# EAGLE board lock-board2_v3 (EAGLE 7.6.0)
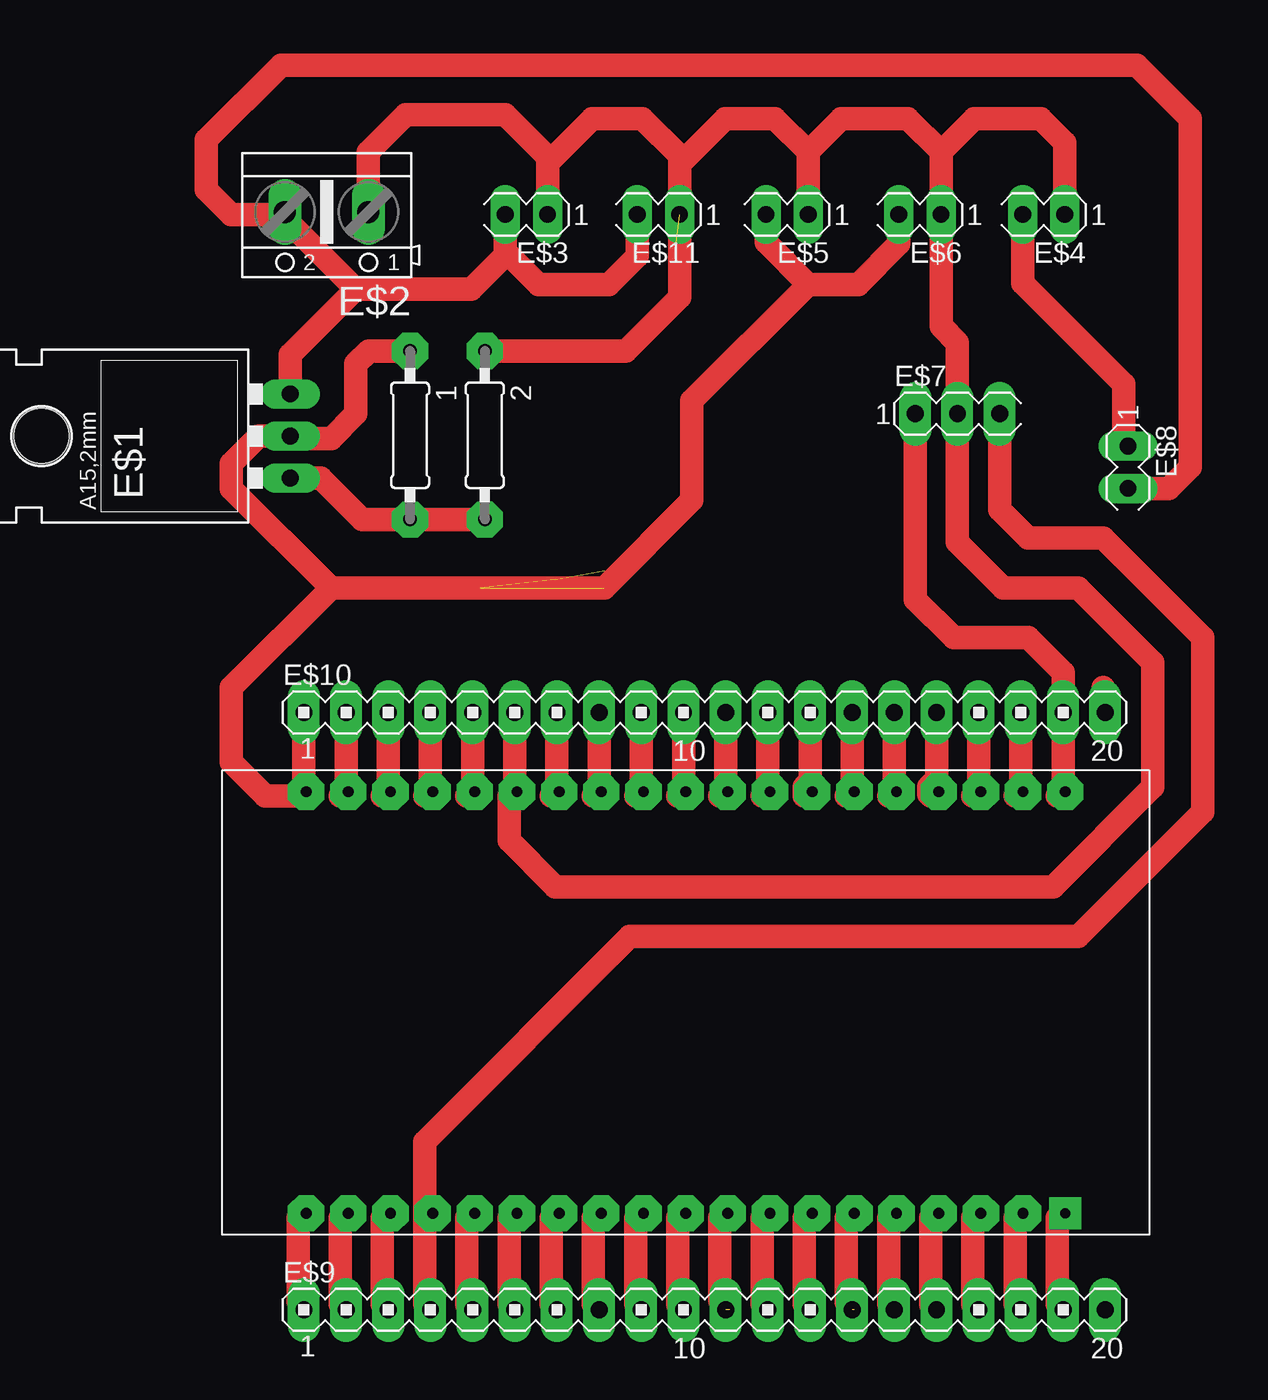
[diagram p0: board, top side]
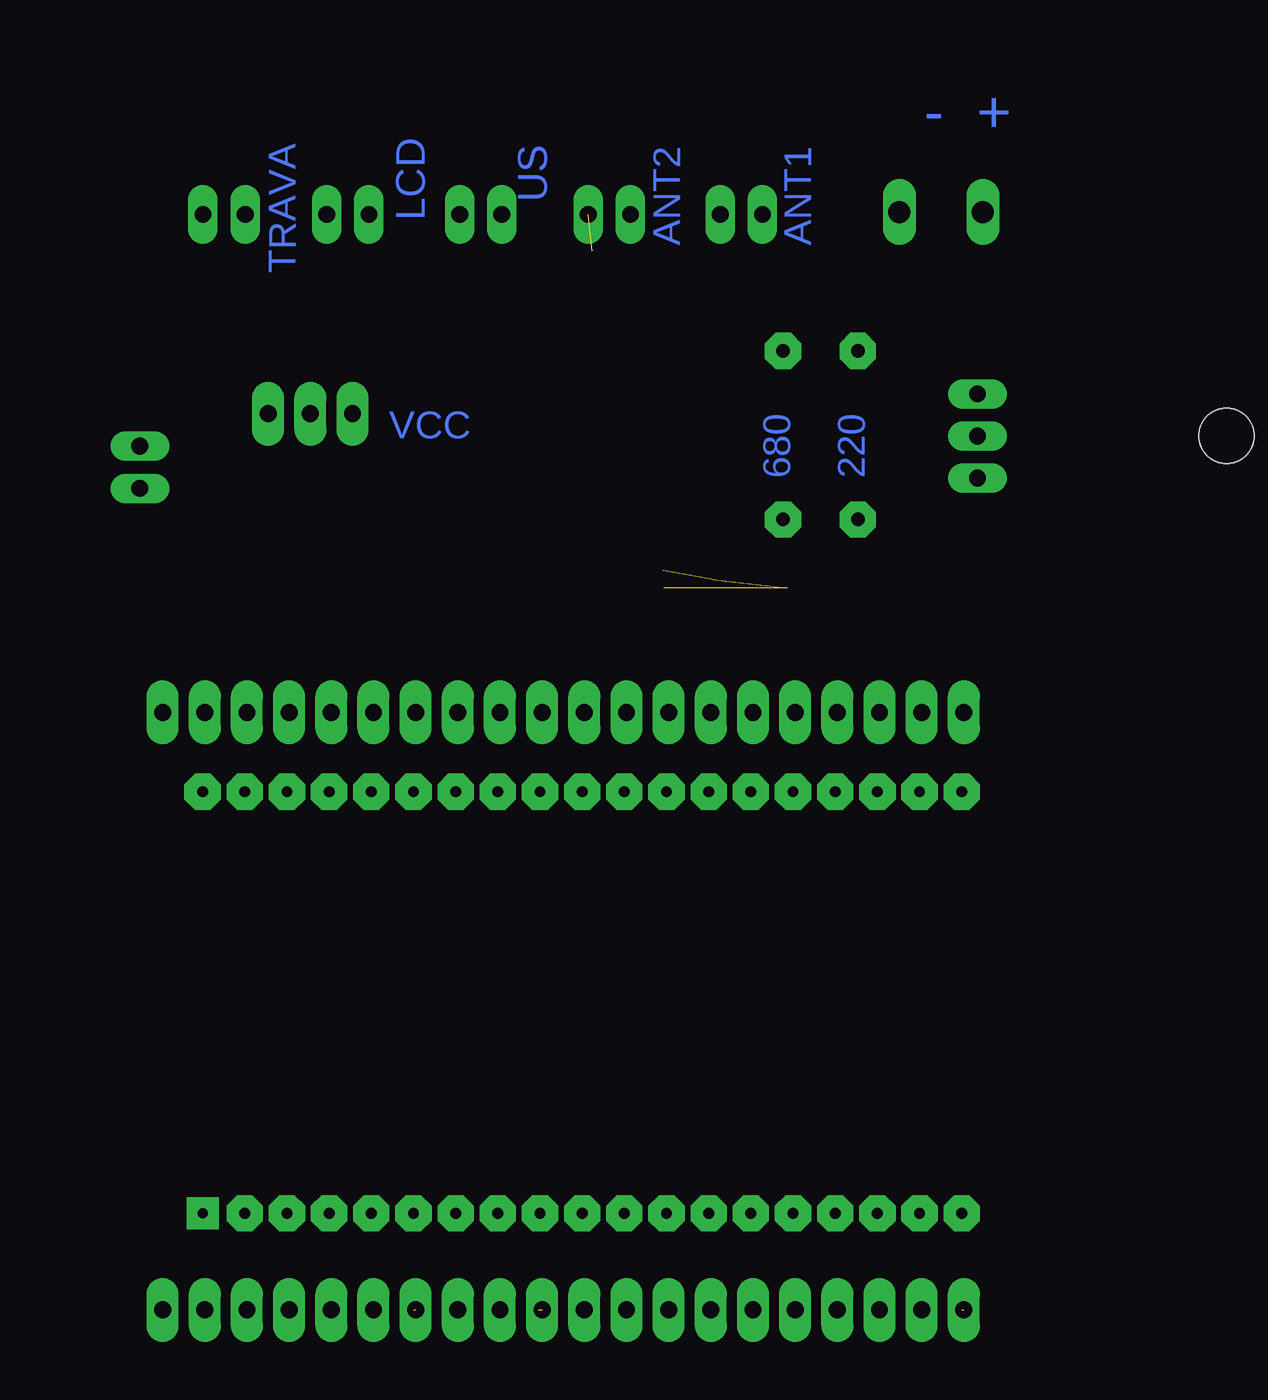
[diagram p1: board, bottom side, seen from below]

No outline drawn. Coordinates in mm, seen from the top.
Copper layers (1*16): Top 0.035mm / dielectric 1.5mm / Bottom 0.035mm
Design rules "default": minimum track width 10mil, minimum drill 24mil, track to track 8mil, track to pad 8mil, pad to pad 8mil, via to via 8mil, smd to smd 8mil, copper to edge 40mil, drill to drill 8mil, minimum pad ring 10mil, minimum via ring 8mil, stop-mask expansion 4mil, vias tented up to drill 0mil, thermal gap 10mil
Net classes: 0 default: clearance 0.205 mm

## Footprints (pad centres in the part's own frame; a part is rotated, then mirrored left to right if it is on the bottom)
0207/10 = drill 0.813 pad 2.184 octagon: 1 -5.08,0; 2 5.08,0
317TL = drill 1.016 pad 1.778 long: 1 -2.54,-3.81; 2 0,-3.81; 3 2.54,-3.81 | hole 3.302: 0,11.176
AK500/2 = drill 1.321 long: 1 -2.515,0; 2 2.515,0
MA03-1 = drill 1.016 pad 1.778 long: 1 -2.54,0; 2 0,0
MA04-1 = drill 1.016 pad 1.93 long: 1 -3.81,0; 2 -1.27,0; 3 1.27,0
MA20-1 = drill 1.016 pad 1.93 long: 1 -24.13,0; 2 -21.59,0; 3 -19.05,0; 4 -16.51,0; 5 -13.97,0; 6 -11.43,0; 7 -8.89,0; 8 -6.35,0; 9 -3.81,0; 10 -1.27,0; 11 1.27,0; 12 3.81,0; 13 6.35,0; 14 8.89,0; 15 11.43,0; 16 13.97,0; 17 16.51,0; 18 19.05,0; 19 21.59,0; 20 24.13,0
ESP32 = drill 0.6 pad 1.93 square: P$20 -60.96,-30.48 | drill 0.65 pad 2.184 octagon: P$21 -60.96,-27.94; P$41 -60.96,-25.4; P$42 -60.96,-22.86; P$43 -60.96,-20.32; P$44 -60.96,-17.78; P$45 -60.96,-15.24; P$46 -60.96,-12.7; P$47 -60.96,-10.16; P$48 -60.96,-7.62; P$49 -60.96,-5.08; P$50 -60.96,-2.54; P$51 -60.96,0; P$52 -60.96,2.54; P$53 -60.96,5.08; P$54 -60.96,7.62; P$55 -60.96,10.16; P$56 -60.96,12.7; P$57 -60.96,15.24; P$58 -35.56,15.24; P$59 -35.56,12.7; P$60 -35.56,10.16; P$61 -35.56,7.62; P$62 -35.56,5.08; P$63 -35.56,2.54; P$64 -35.56,0; P$65 -35.56,-2.54; P$66 -35.56,-5.08; P$67 -35.56,-7.62; P$68 -35.56,-10.16; P$69 -35.56,-12.7; P$70 -35.56,-15.24; P$71 -35.56,-17.78; P$72 -35.56,-20.32; P$73 -35.56,-22.86; P$74 -35.56,-25.4; P$75 -35.56,-27.94; P$76 -35.56,-30.48

## Placement (x,y rotation side)
1  [0207/10]  35.45,64.93 270 top
2  [0207/10]  39.95,64.93 270 top
E$1  [317TL]  24.43,64.88 90 top
E$2  [AK500/2]  30.43,78.38 180 top
E$3  [MA03-1]  41.19,78.23 180 top
E$4  [MA03-1]  72.35,78.23 180 top
E$5  [MA03-1]  56.89,78.23 180 top
E$6  [MA03-1]  64.89,78.23 180 top
E$7  [MA04-1]  69.69,66.23 0 top
E$8  [MA03-1]  78.69,61.73 270 top
E$9  [MA20-1]  53.19,12.23 0 top
E$10  [MA20-1]  53.19,48.23 0 top
E$11  [MA03-1]  49.14,78.23 180 top
E$23  [ESP32]  44.43,79.01 90 top

## Library data of the parts
1 2 = eagle-ltspice
E$1 = v-reg
E$2 = con-ptr500
E$3-E$11 = con-lstb
E$23 = esp32

## Nets
S$1: 1.2 2.2 E$1.1
S$2: E$1.3 E$2.2 E$3.2 E$8.2 E$11.2
S$5: E$4.2 E$8.1
S$6: E$9.1
S$8: E$9.2
S$10: E$9.3
S$26: E$7.3 E$9.4
S$32: E$9.5
S$45: E$9.6
S$88: E$9.7
S$89: E$9.8
S$90: E$9.9
S$91: E$9.10
S$92: E$9.11
S$93: E$9.12
S$94: E$9.13
S$95: E$9.14
S$96: E$9.15
S$97: E$9.16
S$98: E$9.17
S$99: E$9.18
S$100: E$9.19
S$101: 1.1 E$1.2 E$5.2 E$6.2 E$10.1
S$102: E$10.2
S$103: E$10.3
S$104: E$10.4
S$105: E$10.5
S$106: 2.1 E$2.1 E$3.1 E$4.1 E$5.1 E$6.1 E$7.2 E$10.6 E$11.1
S$107: E$10.7
S$108: E$10.8
S$109: E$10.9
S$110: E$10.10
S$111: E$10.11
S$112: E$10.12
S$113: E$10.13
S$114: E$10.14
S$115: E$10.15
S$116: E$10.16
S$117: E$10.17
S$118: E$10.18
S$119: E$7.1 E$10.19
S$120: E$10.20

## Tracks (layer width: path | path; a pad name or v marks a point on that pad's centre or on a via)
S$1
  Top 1.422: E$1.1 30.08,62.34 32.57,59.85 1.2 2.2
S$2
  Top 1.422: E$1.3 28.24,69.78 32.19,73.73 | 32.19,73.73 27.91,78 E$2.2 27.77,78.23 24.69,78.23 23.19,79.73 23.19,82.73 27.69,87.23 79.21,87.23 82.43,84.01 82.43,63.01 81.15,61.73 E$8.2 | E$3.2 41.19,76.01 | 41.19,76.01 41.19,75.77 39.15,73.73 32.19,73.73 | E$11.2 49.14,75.72 47.43,74.01 43.19,74.01 41.19,76.01
S$5
  Top 1.422: E$4.2 72.35,74.09 78.43,68.01 78.43,64.53 E$8.1
S$6  (1 unrouted)
  Top 1.422: 28.71,17.79 28.71,12.71 29.19,12.23
S$8
  Top 1.422: 31.25,17.79 31.25,12.58 E$9.2
S$10
  Top 1.422: 33.79,17.79 33.79,12.58 E$9.3
S$26
  Top 1.422: E$9.4 36.33,12.58 36.33,22.37 48.69,34.73 75.69,34.73 83.19,42.23 83.19,52.73 77.19,58.73 72.69,58.73 70.96,60.46 E$7.3
S$32
  Top 1.422: 38.87,17.79 38.87,12.58 E$9.5
S$45
  Top 1.422: 41.41,17.79 41.41,12.58 E$9.6
S$88
  Top 1.422: 43.95,17.79 43.95,12.58 E$9.7
S$89
  Top 1.422: 46.49,17.79 46.49,12.58 E$9.8
S$90
  Top 1.422: 49.03,17.79 49.03,12.58 E$9.9
S$91
  Top 1.422: 51.57,17.79 51.57,12.58 E$9.10
S$92  (1 unrouted)
  Top 1.422: 54.11,17.79 54.11,12.81 54.69,12.23
S$93
  Top 1.422: 56.65,17.79 56.65,12.58 E$9.12
S$94
  Top 1.422: 59.19,17.79 59.19,12.58 E$9.13
S$95  (1 unrouted)
  Top 1.422: 61.73,17.79 61.73,12.69 62.19,12.23
S$96
  Top 1.422: 64.27,17.79 64.27,12.58 E$9.15
S$97
  Top 1.422: 66.81,17.79 66.81,12.58 E$9.16
S$98
  Top 1.422: 69.35,17.79 69.35,12.58 E$9.17
S$99
  Top 1.422: 71.89,17.79 71.89,12.58 E$9.18
S$100
  Top 1.422: 74.43,17.79 74.43,12.58 E$9.19
S$101  (3 unrouted)
  Top 1.422: E$10.1 29.06,43.86 29.19,43.73 29.19,43.67 28.71,43.19 26.73,43.19 24.69,45.23 24.69,49.73 30.69,55.73 | 1.1 32.97,70.01 32.19,69.23 32.19,66.23 30.69,64.73 28.39,64.73 E$1.2 26.34,64.88 24.69,63.23 24.69,61.73 30.69,55.73 | 30.69,55.73 47.15,55.73 52.43,61.01 52.43,67.01 59.43,74.01 | E$6.2 64.89,76.47 62.43,74.01 59.43,74.01 | E$5.2 56.89,76.55 59.43,74.01
S$102
  Top 1.422: E$10.2 31.6,43.54 31.25,43.19
S$103
  Top 1.422: E$10.3 34.14,43.54 33.79,43.19
S$104
  Top 1.422: E$10.4 36.68,43.74 36.69,43.73 36.69,43.55 36.33,43.19
S$105
  Top 1.422: E$10.5 39.22,43.54 38.87,43.19
S$106  (1 unrouted)
  Top 1.422: E$10.6 41.76,43.54 41.41,43.19 41.41,40.51 44.19,37.73 74.19,37.73 80.19,43.73 80.19,51.23 75.69,55.73 71.19,55.73 68.42,58.5 E$7.2 68.42,70.5 67.43,71.49 E$6.1 67.43,82.01 | E$3.1 43.73,81.69 41.19,84.23 35.19,84.23 32.95,81.98 E$2.1 | E$3.1 43.73,80.77 | E$3.1 43.73,81.31 46.43,84.01 49.43,84.01 51.68,81.76 E$11.1 | E$11.1 51.68,81.26 54.43,84.01 57.43,84.01 59.43,82.01 | E$5.1 59.43,82.01 | 67.43,82.01 65.43,84.01 61.43,84.01 59.43,82.01 | E$4.1 74.89,82.55 73.43,84.01 69.43,84.01 67.43,82.01 | 2.1 48.43,70.01 51.68,73.26 E$11.1
S$107
  Top 1.422: E$10.7 44.3,43.84 44.19,43.73 44.19,43.43 43.95,43.19
S$108
  Top 1.422: E$10.8 46.84,43.54 46.49,43.19
S$109
  Top 1.422: E$10.9 49.38,43.54 49.03,43.19
S$110
  Top 1.422: E$10.10 51.92,43.54 51.57,43.19
S$111
  Top 1.422: E$10.11 54.46,43.54 54.11,43.19
S$112
  Top 1.422: E$10.12 57,43.54 56.65,43.19
S$113
  Top 1.422: E$10.13 59.54,44.08 59.19,43.73 59.19,43.19
S$114
  Top 1.422: E$10.14 62.08,43.54 61.73,43.19
S$115
  Top 1.422: E$10.15 64.62,43.54 64.27,43.19
S$116
  Top 1.422: E$10.16 67.16,44.2 66.69,43.73 66.69,43.31 66.81,43.19
S$117
  Top 1.422: E$10.17 69.7,43.54 69.35,43.19
S$118
  Top 1.422: E$10.18 72.24,43.54 71.89,43.19
S$119
  Top 1.422: 74.43,43.19 74.78,43.54 E$10.19 74.78,50.64 72.69,52.73 68.19,52.73 65.88,55.04 E$7.1
S$120
  Top 1.422: 77.19,49.73 77.19,48.36 E$10.20

## Text on the board
Bottom: - + | LCD | TRAVA | ANT1 | ANT2 | US | 220 | 680 | VCC